# Altium PCB ui_layout-v1.0.1.PcbDoc
Units mil, origin at the board's own origin, x right, y up, seen from the top; angles counter-clockwise.
Board outline 3110 x 1889.76 mil, 4 copper layers (Power Plane, Signal Layer 1, Signal Layer 2, GND Plane), stack 61.811 mil thick; 45 components, 52 nets, 161 pads, 85 vias.
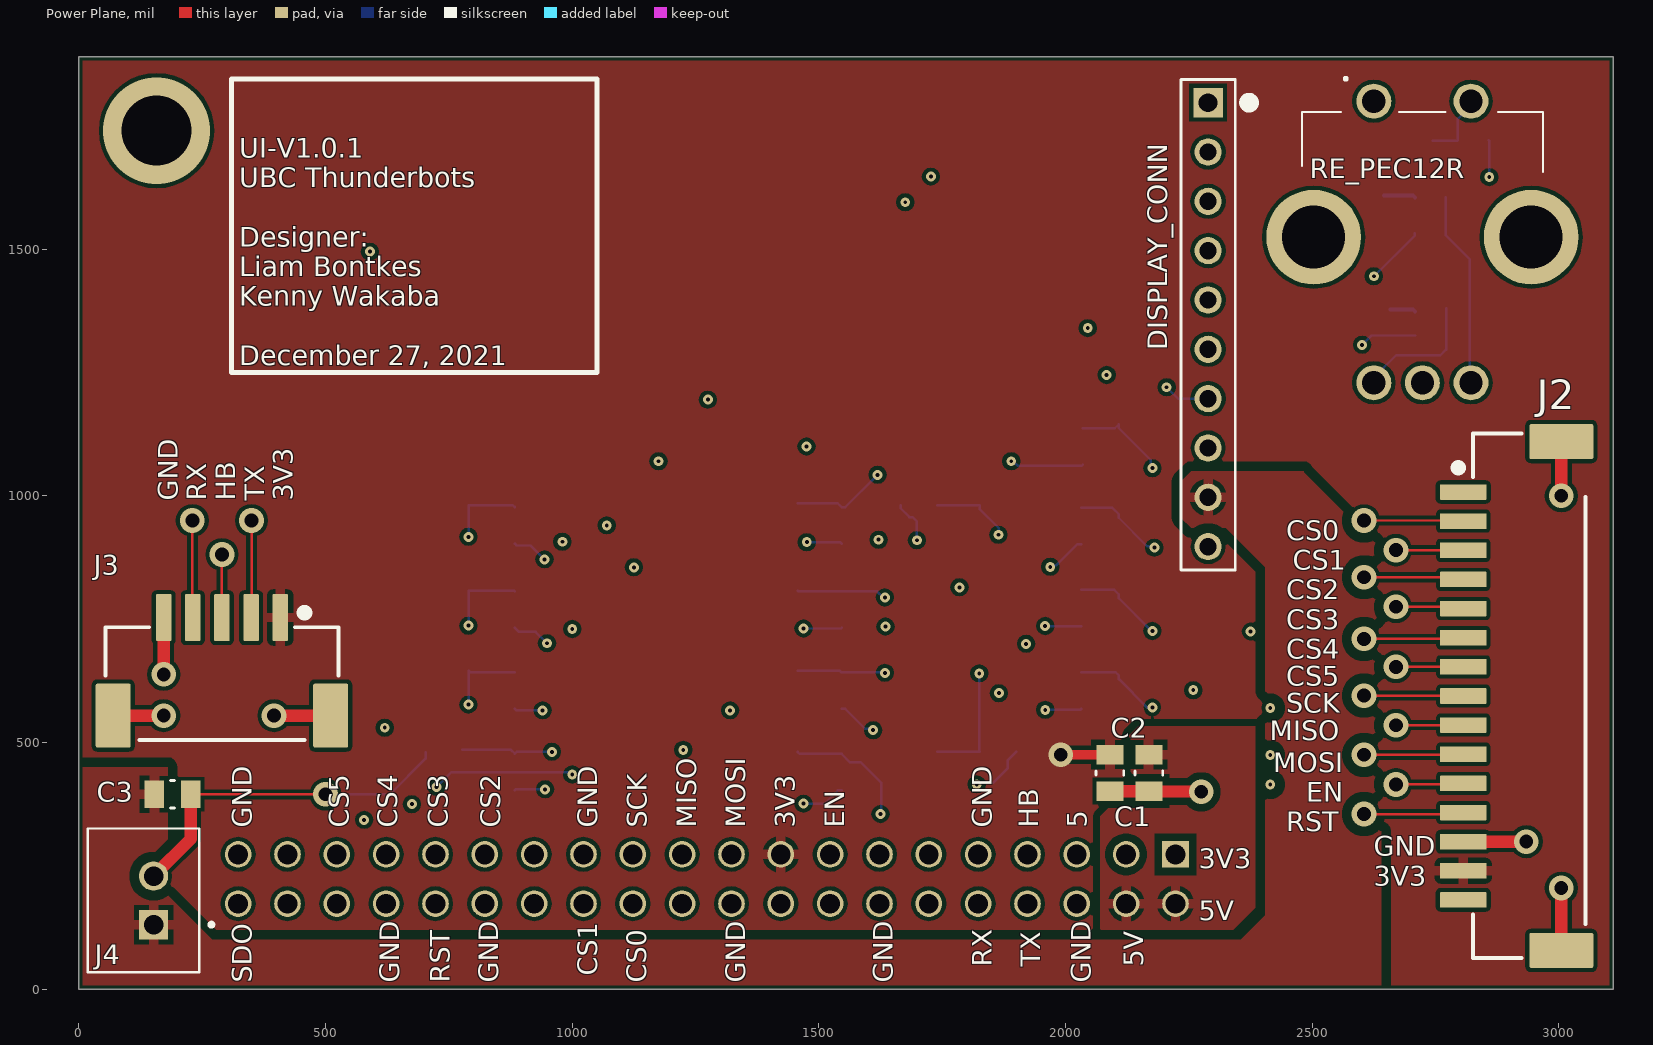
[diagram p0: Power Plane view]
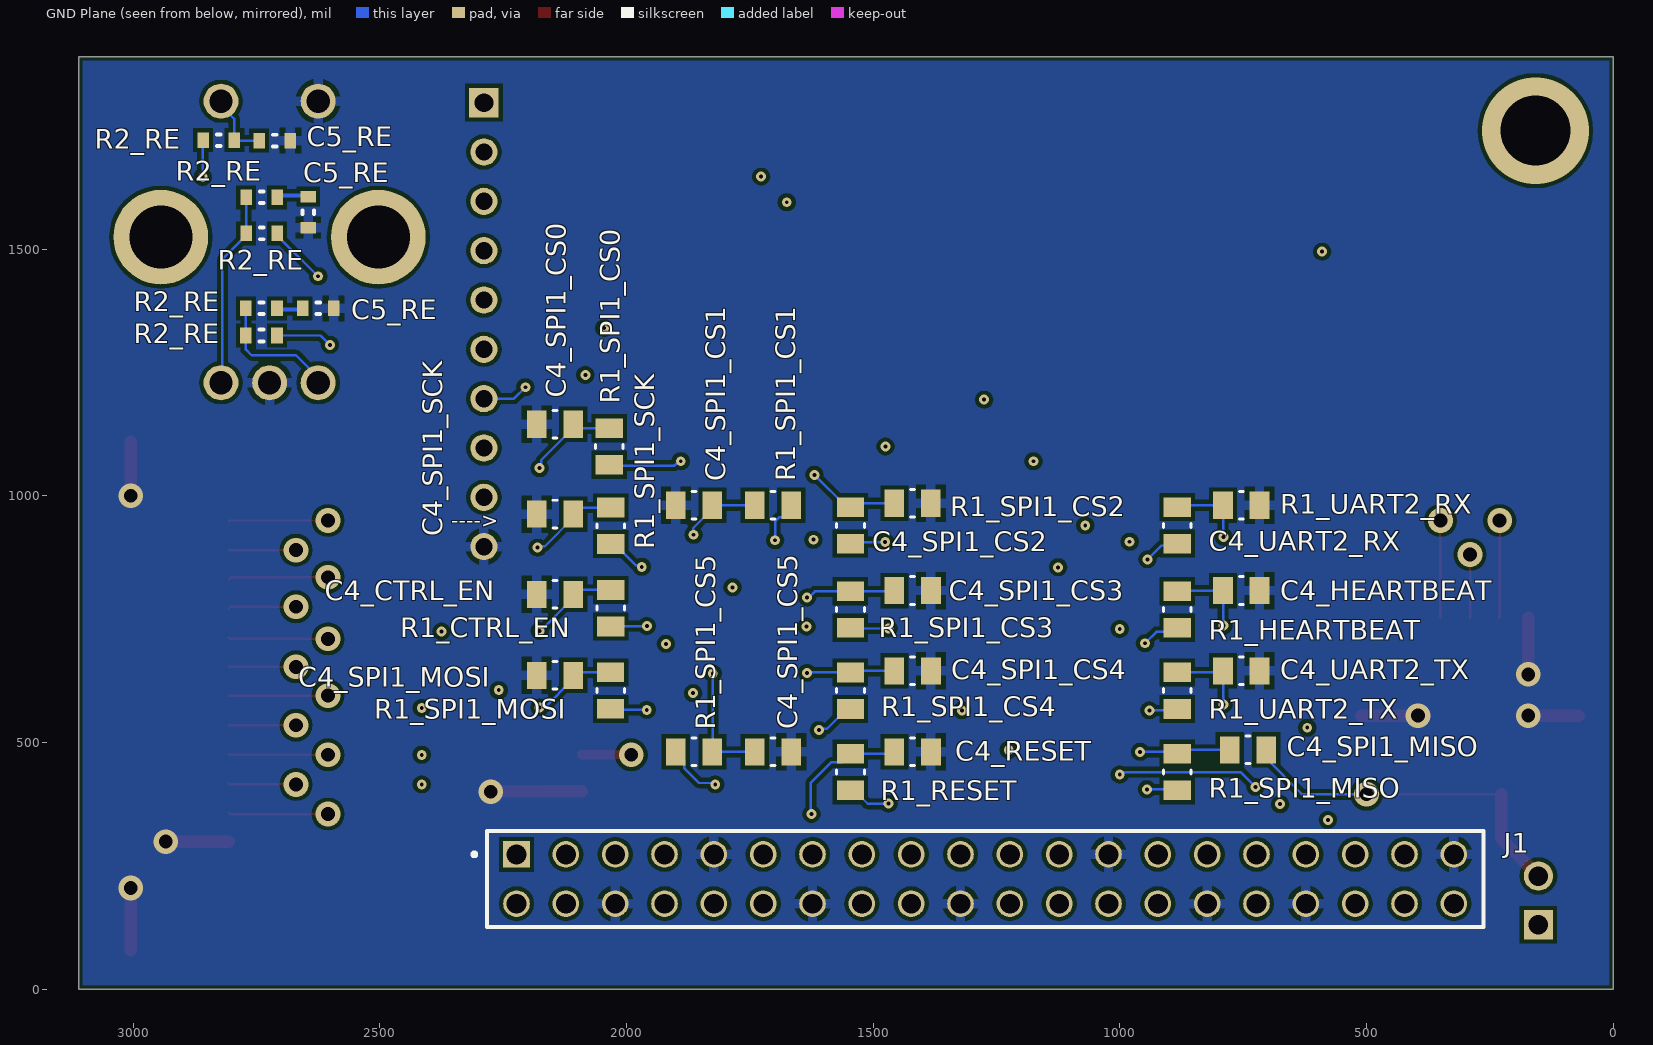
[diagram p1: GND Plane view, seen from below]
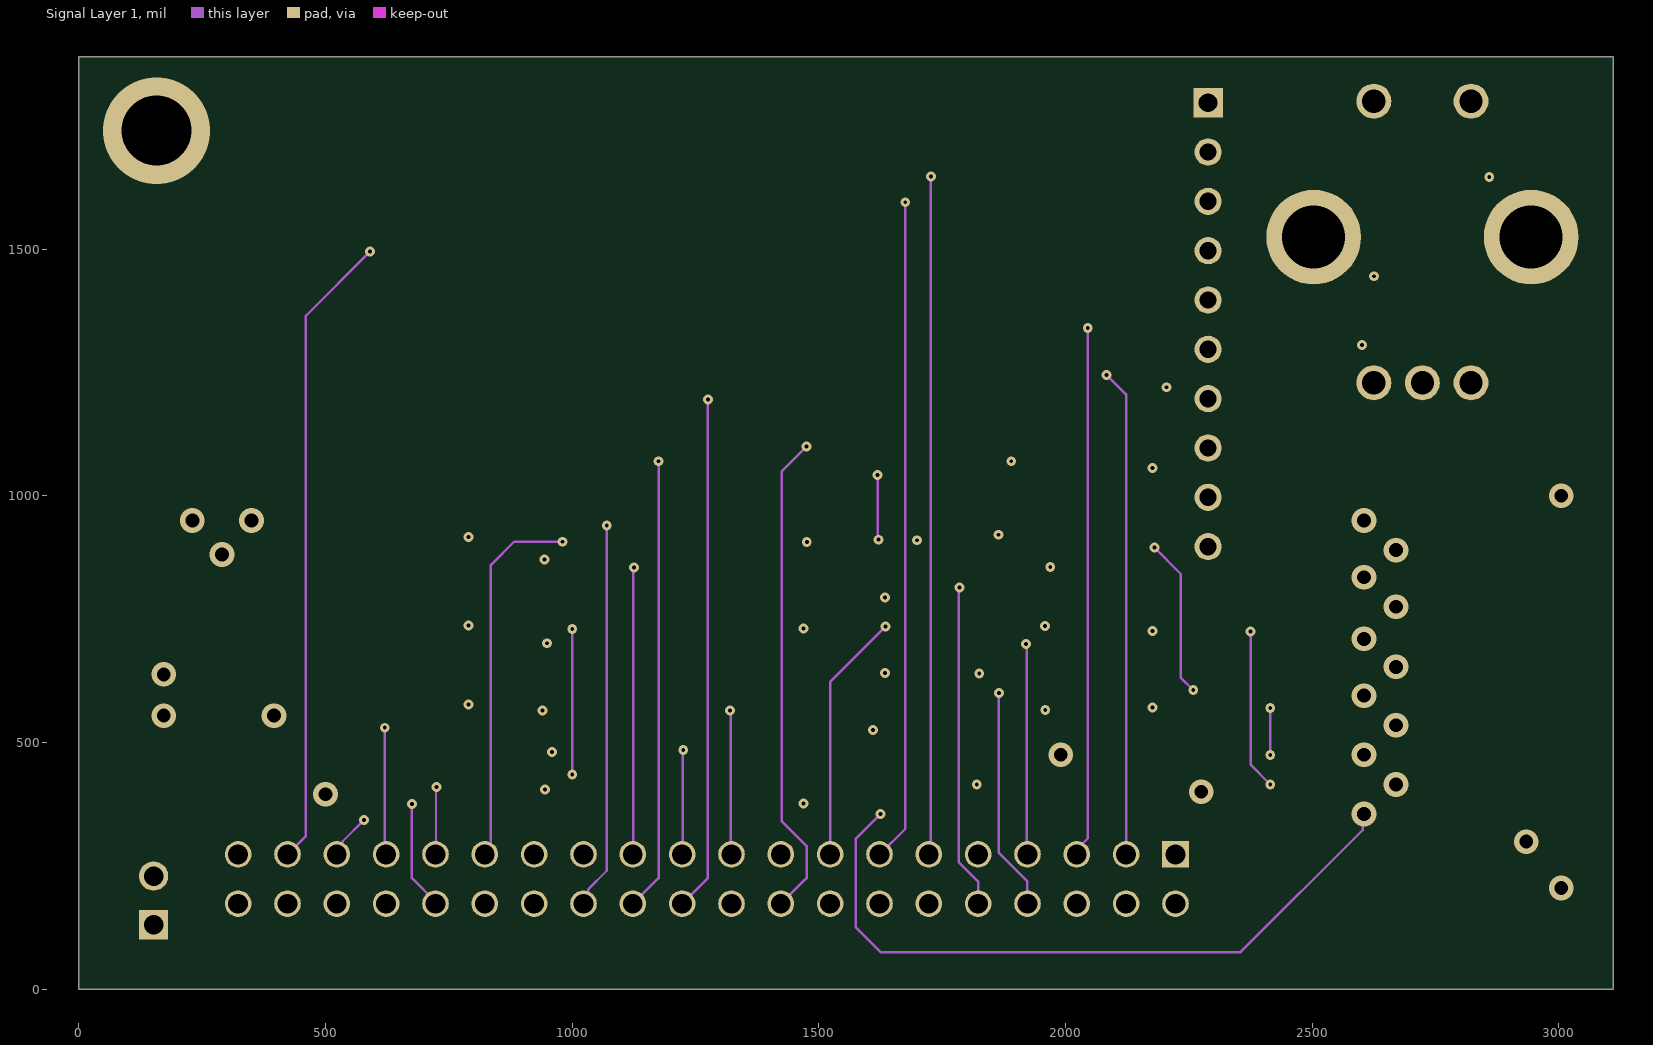
[diagram p2: Signal Layer 1]
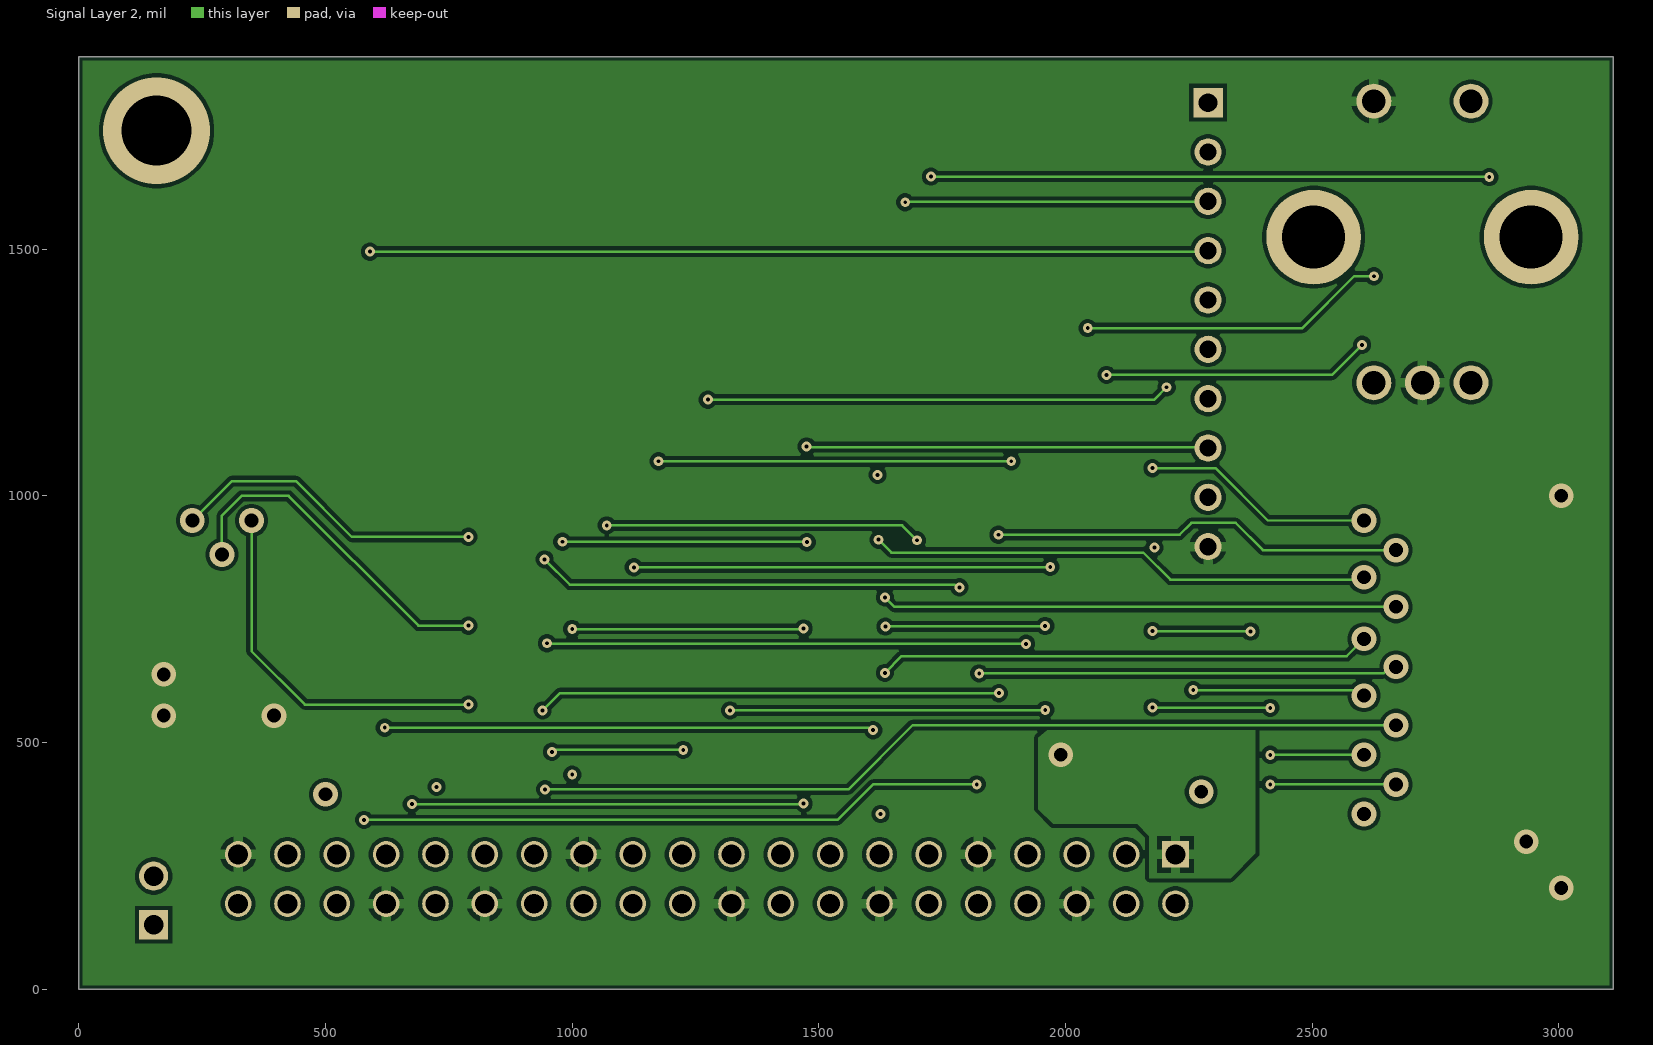
[diagram p3: Signal Layer 2]
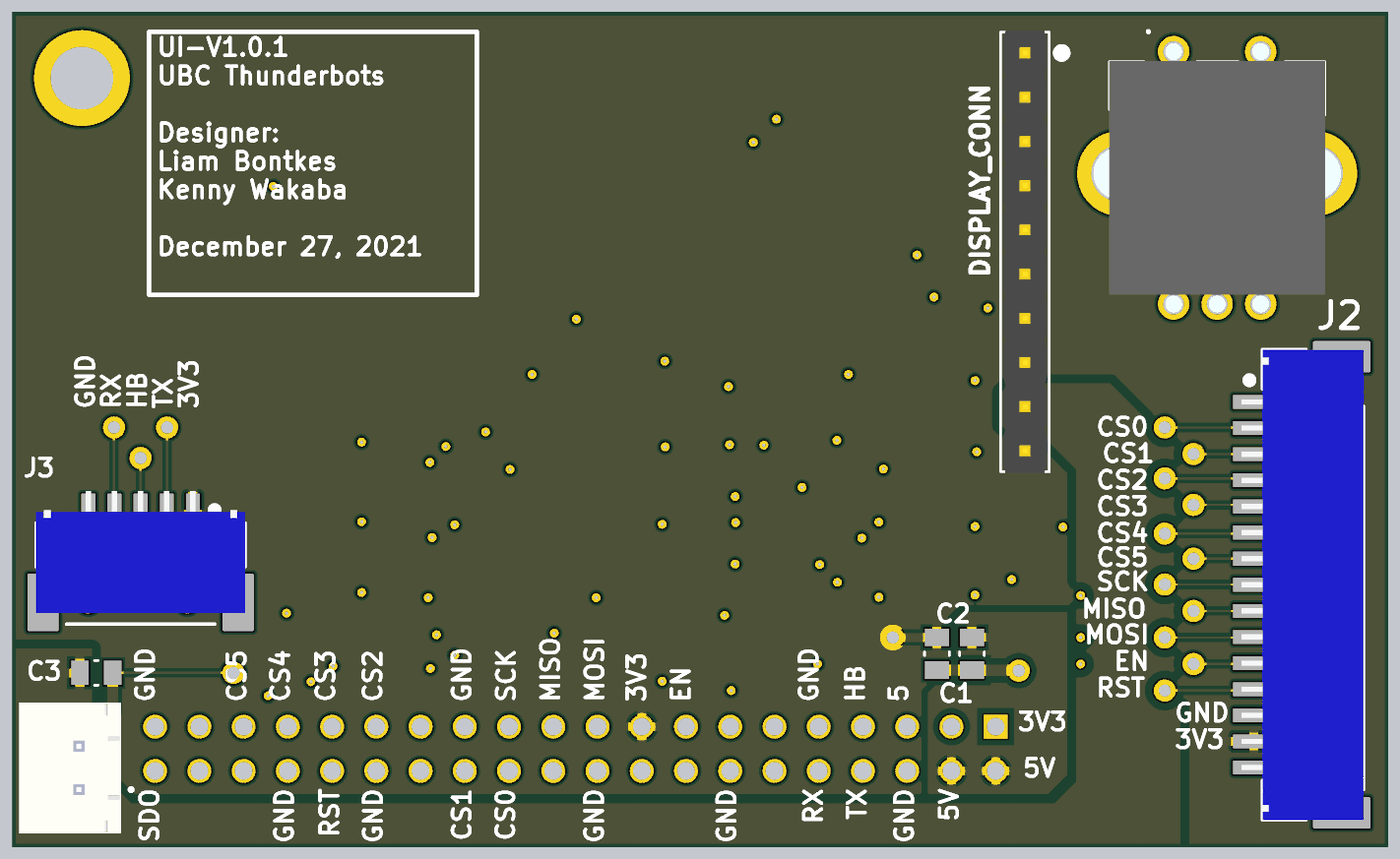
[diagram p4: 3D render of the assembled board from above, using the file's embedded part models]

## Layer stack, top to bottom
Top Mask: solder mask 0.5906, Solder Resist, Dk 3.8
Power Plane: signal copper 1.378
Dielectric 1: prepreg 3.937, 2313, Dk 4.05
Signal Layer 1: signal copper 0.689
Core: core 49.8031, FR-4, Dk 4.5
Signal Layer 2: signal copper 0.689
Dielectric 2: prepreg 3.937, 2313, Dk 4.05
GND Plane: signal copper 1.378
Bottom Mask: solder mask 0.5906, Solder Resist, Dk 3.8

## Board outline
0,0 0,1889.76 3110,1889.76 3110,0

## Design rules (kind name [scope] priority, off if disabled: settings)
BoardOutlineClearance [All] p1: gap=7.87 ignorepadtopadclearanceinfootprint=FALSE except(15.75: Arc-SplitBarrior Arc-SplitContinuation Track-SplitBarrior Track-SplitContinuation SMDPad-SplitBarrior SMDPad-SplitContinuation THPad-SplitBarrior THPad-SplitContinuation Via-SplitBarrior Via-SplitContinuation Fill-SplitBarrior Fill-SplitContinuation Poly-SplitBarrior Poly-SplitContinuation Region-SplitBarrior Region-SplitContinuation Text-SplitBarrior Text-SplitContinuation)
Clearance "JETSON_5V Polygon Clearance" [(InNet('JETSON_5V')) AND InPolygon] p1: gap=15 ignorepadtopadclearanceinfootprint=FALSE
Clearance "POWER_5V Polygon Clearance" [(InNet('POWER_5V')) AND InPolygon] p2: gap=20 ignorepadtopadclearanceinfootprint=TRUE
Clearance [All] p3: gap=8 ignorepadtopadclearanceinfootprint=FALSE
HoleSize [All] p1: absolutevalues=TRUE maxlimit=248.03 minlimit=7.87 maxpercent=80.000 minpercent=20.000
MinimumAnnularRing [All] p1: minimumring=3
MinimumSolderMaskSliver [All] p1: minsoldermaskwidth=3.94
PolygonConnect PolygonConnect_1 [All] p1: thpad.connectstyle=Relief thpad.reliefconductorwidth=20 thpad.reliefentries=4 thpad.polygonreliefangle="90 Angle" thpad.airgapwidth=10 smdpad.connectstyle=Relief smdpad.reliefconductorwidth=20 smdpad.reliefentries=4 smdpad.polygonreliefangle="90 Angle" smdpad.airgapwidth=10 via.connectstyle=Direct via.reliefconductorwidth=20 via.reliefentries=4 via.polygonreliefangle="90 Angle" via.airgapwidth=10
RoutingCorners [All] p1: cornerstyle=Round minsetback=100 maxsetback=100
RoutingVias [All] p1: holewidth=19.68 width=39.37 viastyle="Through Hole" minholewidth=7.87 minwidth=17.72 maxholewidth=39.37 maxwidth=78.74
SilkToSilkClearance [All] p1: silktosilkclearance=3.94
SilkToSolderMaskClearance [IsPad] p1: minsilkscreentomaskgap=3.94 clearancetoexposedcopper=TRUE
SolderMaskExpansion [All] p1: expansion=4 istentingtop=FALSE
Width [All] p1: maxlimit=100 minlimit=3.5 preferedwidth=15
25 further rules are at their usual default settings.

## Classes and differential pairs
component class ROTARY_ENCODER_FILTER: C5_RE R2_RE
component class "ROTARY ENCODER": RE_PEC12R
channel class low-pass-filter: CTRL_EN_FILTER HEARTBEAT_FILTER RESET_FILTER SPI1_CS0_FILTER SPI1_CS1_FILTER SPI1_CS2_FILTER SPI1_CS3_FILTER SPI1_CS4_FILTER SPI1_CS5_FILTER SPI1_MISO_FILTER SPI1_MOSI_FILTER SPI1_SCK_FILTER UART2_RX_FILTER UART2_TX_FILTER
component class UART2_TX_FILTER: C4_UART2_TX R1_UART2_TX
component class UART2_RX_FILTER: C4_UART2_RX R1_UART2_RX
component class U_power: C3 J3 J4
component class U_jetson-nano: C1 C2 J1
component class SPI1_SCK_FILTER: C4_SPI1_SCK R1_SPI1_SCK
component class SPI1_MOSI_FILTER: C4_SPI1_MOSI R1_SPI1_MOSI
component class SPI1_MISO_FILTER: C4_SPI1_MISO R1_SPI1_MISO
component class SPI1_CS5_FILTER: C4_SPI1_CS5 R1_SPI1_CS5
component class SPI1_CS4_FILTER: C4_SPI1_CS4 R1_SPI1_CS4
component class SPI1_CS3_FILTER: C4_SPI1_CS3 R1_SPI1_CS3
component class SPI1_CS2_FILTER: C4_SPI1_CS2 R1_SPI1_CS2
component class SPI1_CS1_FILTER: C4_SPI1_CS1 R1_SPI1_CS1
component class SPI1_CS0_FILTER: C4_SPI1_CS0 R1_SPI1_CS0
component class RESET_FILTER: C4_RESET R1_RESET
component class HEARTBEAT_FILTER: C4_HEARTBEAT R1_HEARTBEAT
component class CTRL_EN_FILTER: C4_CTRL_EN R1_CTRL_EN

## Components (designator, comment, footprint, x,y, rotation, side; value= is the part's Value field where it differs from the comment)
C1 "0.1uF 25V" 0805 2169.06,438.35 r90 top value=0.1uF
C2 "0.1uF 25V" 0805 2090,438.35 r90 top value=0.1uF
C3 "0.1uF 25V" 0805 190,395 r180 top value=0.1uF
C4_CTRL_EN "100pF 16V" 0805 2144.8,800.17 r180 bottom value=100pF
C4_HEARTBEAT "100pF 16V" 0805 753.73,808.01 r0 bottom value=100pF
C4_RESET "100pF 16V" 0805 1419.93,481 r0 bottom value=100pF
C4_SPI1_CS0 "100pF 16V" 0805 2144.8,1145 r180 bottom value=100pF
C4_SPI1_CS1 "100pF 16V" 0805 1862.99,980.84 r180 bottom value=100pF
C4_SPI1_CS2 "100pF 16V" 0805 1420,985 r0 bottom value=100pF
C4_SPI1_CS3 "100pF 16V" 0805 1419.93,808.01 r0 bottom value=100pF
C4_SPI1_CS4 "100pF 16V" 0805 1419.93,645.17 r0 bottom value=100pF
C4_SPI1_CS5 "100pF 16V" 0805 1702.99,481 r0 bottom value=100pF
C4_SPI1_MISO "100pF 16V" 0805 740,485 r0 bottom value=100pF
C4_SPI1_MOSI "100pF 16V" 0805 2145,636 r180 bottom value=100pF
C4_SPI1_SCK "100pF 16V" 0805 2144.8,963.01 r180 bottom value=100pF
C4_UART2_RX "100pF 16V" 0805 753.73,980.84 r0 bottom value=100pF
C4_UART2_TX "100pF 16V" 0805 753.73,645.18 r0 bottom value=100pF
C5_RE "Comment" 0603#1 2712.94,1720 r0 bottom
C5_RE "Comment" 0603#2 2625,1380 r0 bottom
C5_RE "Comment" 0603#3 2645,1575 r90 bottom
DISPLAY_CONN "Comment" 1-87224-0_TYC 2289,1797 r90 top
J1 "CN HDR 40POS" "CN HDR 40POS 0.1 TH" 1272.83,223.23 r0 bottom locked
J2 "Comment" "JST ZE SMT 15POS" 2914.45,564.72 r90 top
J3 "CN HDR 5POS" "CN HDR 5POS SMD 1.5MM" 290,645 r0 top
J4 "CN HDR 2POS JST XH" JST_B2B-XH-A(LF)(SN) 130.79,180 r90 top
R1_CTRL_EN "160" 0805 2031.84,772.23 r270 bottom value=1
R1_HEARTBEAT "160" 0805 883.65,769.45 r270 bottom value=1
R1_RESET "160" 0805 1545.92,440.17 r270 bottom value=1
R1_SPI1_CS0 "160" 0805 2035,1100 r270 bottom value=1
R1_SPI1_CS1 "160" 0805 1702.99,980.84 r180 bottom value=1
R1_SPI1_CS2 "160" 0805 1545.92,940.02 r270 bottom value=1
R1_SPI1_CS3 "160" 0805 1545.92,769.45 r270 bottom value=1
R1_SPI1_CS4 "160" 0805 1545.92,605 r270 bottom value=1
R1_SPI1_CS5 "160" 0805 1862.99,481 r0 bottom value=1
R1_SPI1_MISO "160" 0805 883.65,440.17 r270 bottom value=1
R1_SPI1_MOSI "160" 0805 2032.05,605.17 r270 bottom value=1
R1_SPI1_SCK "160" 0805 2031.84,939.29 r270 bottom value=1
R1_UART2_RX "160" 0805 883.65,940.02 r270 bottom value=1
R1_UART2_TX "160" 0805 883.65,605.1 r270 bottom value=1
R2_RE "Comment" 0603#4 2826.5,1721 r180 bottom
R2_RE "Comment" 0603#5 2739.5,1605 r180 bottom
R2_RE "Comment" 0603#6 2739.5,1532 r180 bottom
R2_RE "Comment" 0603#6 2740,1325 r180 bottom
R2_RE "Comment" 0603#7 2740,1380 r180 bottom
RE_PEC12R "Comment" PEC12R4220FS0024 2625,1800 r0 top

## Footprints (in the part's own frame and the unit in brackets; to place one, negate y for a bottom-side part, rotate by r counter-clockwise, add the part's x,y. Pads: shape width x height; smd on the part's side, far side on the other; paste and mask are expansions set on the pad)
1-87224-0_TYC [mil]
  round 55 hole 35 mask+0: CARD_CD(-500,0) D/C(-600,0) GND(-900,0) MISO(-100,0) MOSI(-300,0) RESET(-700,0) SCK(-200,0) TFT_CS(-400,0) VCC(-800,0)
  rect 60x60 hole 38 mask+0: LITE(0,0)
  silkscreen extent -947,-93 47,55, body extent -950,-50 50,50, height 90
0603#1 [mm] "Chip Resistor, 2-Leads, Body 1.60x0.80mm, IPC High Density"
  rect 0.6x0.8 smd: 1(-0.8,0) C5-2(0.8,0)
  silkscreen extent -0.1,-0.3 0.1,0.3, body extent -0.8,-0.4 0.8,0.4, height 0.6
0603#2 [mm] "Chip Resistor, 2-Leads, Body 1.60x0.80mm, IPC High Density"
  rect 0.6x0.8 smd: 1(-0.8,0) C5(0.8,0)
  silkscreen extent -0.1,-0.3 0.1,0.3, body extent -0.8,-0.4 0.8,0.4, height 0.6
0603#3 [mm] "Chip Resistor, 2-Leads, Body 1.60x0.80mm, IPC High Density"
  rect 0.6x0.8 smd: 1(-0.8,0) C5-1(0.8,0)
  silkscreen extent -0.1,-0.3 0.1,0.3, body extent -0.8,-0.4 0.8,0.4, height 0.6
0603#4 [mm] "Chip Resistor, 2-Leads, Body 1.60x0.80mm, IPC High Density"
  rect 0.6x0.8 smd: 1(-0.8,0) R2-2(0.8,0)
  silkscreen extent -0.1,-0.3 0.1,0.3, body extent -0.8,-0.4 0.8,0.4, height 0.6
0603#5 [mm] "Chip Resistor, 2-Leads, Body 1.60x0.80mm, IPC High Density"
  rect 0.6x0.8 smd: 1(-0.8,0) R2-1(0.8,0)
  silkscreen extent -0.1,-0.3 0.1,0.3, body extent -0.8,-0.4 0.8,0.4, height 0.6
0603#6 [mm] "Chip Resistor, 2-Leads, Body 1.60x0.80mm, IPC High Density"
  rect 0.6x0.8 smd: 1(-0.8,0) 2(0.8,0)
  silkscreen extent -0.1,-0.3 0.1,0.3, body extent -0.8,-0.4 0.8,0.4, height 0.6
0603#7 [mm] "Chip Resistor, 2-Leads, Body 1.60x0.80mm, IPC High Density"
  rect 0.6x0.8 smd: 1(-0.8,0) R2(0.8,0)
  silkscreen extent -0.1,-0.3 0.1,0.3, body extent -0.8,-0.4 0.8,0.4, height 0.6
0805 [mil]
  rect 40x55 smd: 1(-37,0) 2(37,0)
  silkscreen extent -4,-28 4,28, body extent -47,-28 47,28, height 24
"CN HDR 5POS SMD 1.5MM" [mm] "Connector Header Surface Mount 5 position 0.059\" (1.50mm)"
  rrect10% 1.8x3.3 smd: 0(-5.6,-2.3) 0(5.6,-2.3)
  rrect10% 0.8x2.4 smd: 1(3,2.75) 2(1.5,2.75) 3(0,2.75) 4(-1.5,2.75) 5(-3,2.75)
  silkscreen extent -6,-3.55 6,3, body extent -6,-2.9 6,4.1, height 7.51
"CN HDR 40POS 0.1 TH" [mm] "40 Position Header Connector 0.100\" (2.54mm) Through Hole"
  rect 1.37x1.37 hole 1.02: 01(24.13,-1.27)
  round 1.37 hole 1.02: 02(24.13,1.27) 03(21.59,-1.27) 04(21.59,1.27) 05(19.05,-1.27) 06(19.05,1.27) 07(16.51,-1.27) 08(16.51,1.27) 09(13.97,-1.27) 10(13.97,1.27) 11(11.43,-1.27) "12 "(11.43,1.27) 13(8.89,-1.27) 14(8.89,1.27) 15(6.35,-1.27) 16(6.35,1.27) 17(3.81,-1.27) 18(3.81,1.27) 19(1.27,-1.27) 20(1.27,1.27) 21(-1.27,-1.27) 22(-1.27,1.27) 23(-3.81,-1.27) 24(-3.81,1.27) 25(-6.35,-1.27) 26(-6.35,1.27) 27(-8.89,-1.27) 28(-8.89,1.27) 29(-11.43,-1.27) 30(-11.43,1.27) 31(-13.97,-1.27) 32(-13.97,1.27) 33(-16.51,-1.27) 34(-16.51,1.27) 35(-19.05,-1.27) 36(-19.05,1.27) 37(-21.59,-1.27) 38(-21.59,1.27) 39(-24.13,-1.27) 40(-24.13,1.27)
  silkscreen extent -25.65,-2.48 26.4,2.47
"JST ZE SMT 15POS" [mm] "15 POS HDR JST ZE"
  rrect10% 1.8x3.3 smd: 0(-12.35,-2.3) 0(13.85,-2.3)
  rrect10% 0.8x2.4 smd: 1(11.25,2.75) 2(9.75,2.75) 3(8.25,2.75) 4(6.75,2.75) 5(5.25,2.75) 6(3.75,2.75) 7(2.25,2.75) 8(0.75,2.75) 9(-0.75,2.75) 10(-2.25,2.75) 11(-3.75,2.75) 12(-5.25,2.75) 13(-6.75,2.75) 14(-8.25,2.75) 15(-9.75,2.75)
  silkscreen extent -12.75,-3.55 14.26,3, body extent -12.75,-3.55 14.25,3.45, height 7.6
JST_B2B-XH-A(LF)(SN) [mm]
  rect 1.508x1.508 hole 1: 1(-1.25,-0.525)
  round 1.508 hole 1: 2(1.25,-0.525)
  silkscreen extent -3.7,-3.6 3.7,2.88, body extent -3.7,-2.85 3.7,2.9, height 7.1
PEC12R4220FS0024 [mm]
  round 1.8 hole 1.2: 1(0,0) 2(5,0) A1(0,-14.5) B1(5,-14.5) C1(2.5,-14.5)
  round 4.875 hole 3.25: MH1(8.1,-7) MH2(-3.1,-7)
  silkscreen extent -3.7,-3.65 8.7,1.2, body extent -4.61,-15 9.62,0.5, height 20.1

## Part data
C1 C2 C3: library part "CAP 0.1uF 25V", "Default Symbol for Capacitors", Operating Temperature="-55°C ~ 125°C", Rating=25V, Temperature Coefficient=X7R, Tolerance=10%, Part Number="CAP 0.1uF 25V"
C4_CTRL_EN C4_HEARTBEAT C4_RESET C4_SPI1_CS0 C4_SPI1_CS1 C4_SPI1_CS2 C4_SPI1_CS3 C4_SPI1_CS4 C4_SPI1_CS5 C4_SPI1_MISO C4_SPI1_MOSI C4_SPI1_SCK C4_UART2_RX C4_UART2_TX: library part "CAP 100pF 16V", "Default Symbol for Capacitors", Operating Temperature="-55°C ~ 125°C", Rating=16V, Temperature Coefficient=X5R, Tolerance=10%, Part Number="CAP 100pF 16V"
C5_RE C5_RE C5_RE: library part "CAP 0.010uF 16V"
DISPLAY_CONN: library part "CONN HEADER VERT 10POS"
J1: "40 Position Header Connector", Supplier Part Number 1=S6104-ND, Part Number="CN HDR 40POS", Pin Count=40, Supplier 1=Digi-Key, Supplier URL 1=https://www.digikey.ca/en/products/detail/sullins-connector-solutions/PPTC202LFBN-RC/807240?s=N4IgTCBcDaIMoDYCMAGALAWgHIBEQF0BfIA
J2: library part "CN 15POS JST ZE SMT"
J3: "Connector Header 5 Position", Supplier Part Number 1=455-2383-1-ND, Part Number="CN HDR 5POS", Pin Count=5, Supplier 1=Digi-Key, Supplier URL 1=https://www.digikey.ca/en/products/detail/jst-sales-america-inc/BM05B-ZESS-TBT-LF-SN/1886989?s=N4IgTCBcDaICwFYEFowGYAcbkEZkDkAREAXQF8g
J4: "Connector Header Through Hole 2 position 0.098 _2.50mm_ / JST XH", Package=None, MF="JST Sales", MP=B2B-XH-A_LF__SN_, Part Number="CN HDR 2POS JST XH", Pin Count=2, Price=None, SnapEDA_Link=https://www.snapeda.com/parts/B2B-XH-A%28LF%29%28SN%29/JST%20Sales%20America%20Inc./view-part/492310/?ref=snap
R1_CTRL_EN R1_HEARTBEAT R1_RESET R1_SPI1_CS0 R1_SPI1_CS1 R1_SPI1_CS2 R1_SPI1_CS3 R1_SPI1_CS4 R1_SPI1_CS5 R1_SPI1_MISO R1_SPI1_MOSI R1_SPI1_SCK R1_UART2_RX R1_UART2_TX: library part "RES 160.0 1/8W", "Default Resistor Symbol", Package=0805, Power (Watts)=0.125W, Tolerance=5%, Part Number="RES 160.0 1/8W"
R2_RE R2_RE R2_RE R2_RE R2_RE: library part "RES 10k 1/8W - 1%"

## Via types
v1: diameter 20, hole 7.87, Power Plane to GND Plane, 61 vias
v2: diameter 50, hole 28, Power Plane to GND Plane, 22 vias
v3: diameter 50, hole 27.56, Power Plane to GND Plane, 1 vias
v4: diameter 216.54, hole 141.73, Power Plane to GND Plane, 1 vias

## Nets (pads, with @x,y where several pads share a name; then routed paths per layer and width w, separated by ;. In a path a pad name is that pad's centre, name@x,y a point inside that pad or via, vN(x,y) a via of type N, cw(c..) or ccw(c..) an arc to the next point about the centre after c; other vN are vias at no path point)
CTRL_EN: J1.15 R1_CTRL_EN.2 | length 905.9
  Signal Layer 1 w5: J1.15 1522.83,622.83 v1(1635,735)
  Signal Layer 2 w5: v1(1635,735) 1635.54,735.54 1958.15,735.54 v1(1958.69,736.08)
  GND Plane w5: v1(1958.69,736.08) 2030.99,736.08 R1_CTRL_EN.2
CTRL_EN_FILTER: C4_CTRL_EN.2 J2.11 R1_CTRL_EN.1 | length 1100.9
  Power Plane w5: v2(2670,415) 2804.09,415 J2.11
  Signal Layer 1 w5: v1(2375,725) 2375,455 v1(2415,415)
  Signal Layer 2 w5: v1(2176.08,726.08) 2176.62,725.54 2374.46,725.54 v1(2375,725) ; v1(2415,415) v2(2670,415)
  GND Plane w5: R1_CTRL_EN.1 2098.74,809.23 C4_CTRL_EN.2 2107.79,792.67 v1@2175.47,725
HEARTBEAT: J1.07 R1_HEARTBEAT.2 | length 1476.2
  Signal Layer 1 w5: v1(1920,700) 1921.42,698.58 1921.42,274.64 J1.07
  Signal Layer 2 w5: v1@950,700 v1(1920,700)
  GND Plane w5: R1_HEARTBEAT.2 891.83,724.28 925.72,724.28 v1(948.92,701.08)
HEARTBEAT_FILTER: C4_HEARTBEAT.2 J3.3 R1_HEARTBEAT.1 | length 997.8
  Power Plane w5: J3.3 v2(290,880.95)
  Signal Layer 2 w5: v2(290,880.95) 290,960 330,1000 425,1000 688.18,736.82 v1(789.65,736.82)
  GND Plane w5: v1@790.73,735.73 C4_HEARTBEAT.2 882.09,808.01 R1_HEARTBEAT.1
I2C_1_SCL: J1.28
I2C_1_SDA: J1.27
I2C_2_SCL: J1.05 R2_RE.2@2708.01,1532 | length 1820.8
  Signal Layer 1 w5: J1.05 2022.83,283.38 2045,305.55 v1(2045,1340)
  Signal Layer 2 w5: v1(2045,1340) 2480,1340 2585,1445 v1(2625,1445)
  GND Plane w5: v1(2625,1445) 2625,1445.06 2708.01,1528.06 R2_RE.2@2708.01,1532
I2C_2_SDA: J1.03 R2_RE.2@2708.5,1325 | length 1644.9
  Signal Layer 1 w5: v1(2083.35,1245) 2122.83,1205.52 J1.03
  Signal Layer 2 w5: v1(2083.35,1245) 2540,1245 v1@2600,1305
  GND Plane w5: v1(2601.08,1306.08) 2620,1325 R2_RE.2@2708.5,1325
I2S_4_SCLK: "J1.12 "
I2S_4_SDIN: J1.38
I2S_4_SDOUT: J1.40
JETSON_3V3: C2.2 J1.01 J1.17 J2.14 J3.1 | length 99.8
  Power Plane w20: v2(1990.33,475) 1990.51,475.17 2089.83,475.17 C2.2
JETSON_5V: C1.2 J1.02 J1.04
JETSON_GND: C1.1 C2.1 C4_CTRL_EN.1 C4_HEARTBEAT.1 C4_RESET.1 C4_SPI1_CS0.1 C4_SPI1_CS1.1 C4_SPI1_CS2.1 C4_SPI1_CS3.1 C4_SPI1_CS4.1 C4_SPI1_CS5.1 C4_SPI1_MOSI.1 C4_SPI1_SCK.1 C4_UART2_RX.1 C4_UART2_TX.1 C5_RE.1 DISPLAY_CONN.GND J1.06 J1.09 J1.14 J1.20 J1.25 J1.30 J1.34 J1.39 J2.0 J2.13 J3.0 J3.5 RE_PEC12R.1 RE_PEC12R.C1 | length 880.6
  Power Plane w25: J3.0@69.53,554.45 169.45,554.45 v2@170,555 ; v2(171.89,638.11) J3.5 ; v2(395.55,554.45) J3.0@510.48,554.45 ; C2.1 C1.1 2169.73,400.67 2274.33,400.67 v2(2275,400) ; J2.13 v2(2933.98,298.98) ; J2.0@3005,78.5 v2(3005,205) ; v2(3005,1000) J2.0@3005,1110
  other v2: 171.89,554.45
NetJ2_8: J2.9 R1_SPI1_MISO.2 | length 1977.9
  Power Plane w5: v2(2670,535) 2804.21,535 2805.29,536.08 J2.9
  Signal Layer 2 w5: v1(945,405) 1560,405 1690,535 v2(2670,535)
  GND Plane w5: R1_SPI1_MISO.2 885.48,405 v1(945,405)
POWER_5V: C3.2 DISPLAY_CONN.VCC J4.1
POWER_GND: C3.1 C4_SPI1_MISO.1 J4.2 | length 715.7
  Power Plane w5: C3.1 v2(500,395)
  Power Plane w25: J4.2 227,304.76 C3.1
  GND Plane w5: v2(500,395) 630.73,395 703,467.27 C4_SPI1_MISO.1@703,480
RESET: J1.32 R1_RESET.2 | length 1105.1
  Signal Layer 1 w5: v1(675,375) 675,225 722.83,177.17 J1.32
  Signal Layer 2 w5: v1(675,375) v1@1470,375
  GND Plane w5: v1(1468.92,376.08) 1469.29,375.71 1510.95,375.71 1538.42,403.17 R1_RESET.2
RESET_FILTER: C4_RESET.2 J2.12 R1_RESET.1 | length 1896.6
  Power Plane w5: v3(2605,355) 2803.15,355 J2.12
  Signal Layer 1 w5: v1(1625,355) 1575,305 1575,125 1625,75 2355,75 2602.5,322.5 2602.5,352.5 v3(2605,355)
  GND Plane w5: C4_RESET.2 1460.76,477.17 R1_RESET.1 1563.42,459.67 1585.33,459.67 1626.08,418.92 1626.08,356.08 v1(1625,355)
ROTARY_ENCODER_FILTER: C5_RE.C5-1 R2_RE.R2-1 | length 64.6
  GND Plane w7.99: C5_RE.C5-1@2645,1608.94 2704.07,1608.94 R2_RE.R2-1
ROTARY_ENCODER_FILTER-1: C5_RE.C5 R2_RE.R2 | length 51.1
  GND Plane w7.99: C5_RE.C5@2658.5,1377.94 2704.07,1377.94 R2_RE.R2@2708.01,1374
ROTARY_ENCODER_FILTER_A1: R2_RE.1@2771.5,1325 R2_RE.1@2771.5,1380 RE_PEC12R.A1 | length 264.5
  GND Plane w5: RE_PEC12R.A1@2622,1230.13 2622,1237 2670,1285 2760,1285 2771.5,1296.5 2771.5,1325 R2_RE.1@2771.5,1380
ROTARY_ENCODER_FILTER_B1: R2_RE.1@2771,1532 R2_RE.1@2771,1605 RE_PEC12R.B1 | length 394.9
  GND Plane w5: R2_RE.1@2771,1605 2771,1532 2771,1528.06 2819.06,1480 2819.06,1230.35 RE_PEC12R.B1@2818.85,1230.13
ROTARY_ENCODER_PUSH_BUTTON_FILTER: C5_RE.C5-2 R2_RE.R2-2 RE_PEC12R.2 | length 140.9
  GND Plane w5: C5_RE.C5-2 2794.01,1720 R2_RE.R2-2 2795.01,1764.13 2818.85,1787.97 RE_PEC12R.2@2818.85,1801
SPI_1_CS0: J1.24 R1_SPI1_CS0.2 | length 1783.1
  Signal Layer 1 w5: J1.24 1123.23,173.23 1175,225 v1(1175,1070)
  Signal Layer 2 w5: v1(1175,1070) v1(1890,1070)
  GND Plane w5: v1(1890,1070) 1894.06,1070 1902.98,1061.08 2033.08,1061.08 R1_SPI1_CS0.2
SPI_1_CS0_FILTER: C4_SPI1_CS0.2 J2.2 R1_SPI1_CS0.1 | length 869.5
  Power Plane w5: v2(2605,950) 2804.76,950 J2.2
  Signal Layer 2 w5: v1@2177.17,1055 v1(2176.08,1056.08) 2303.92,1056.08 2410,950 v2(2605,950)
  GND Plane w5: R1_SPI1_CS0.1 2099.8,1137 C4_SPI1_CS0.2 2107.8,1137.5 2173.21,1072.08 2173.21,1058.95 v1(2176.08,1056.08)
SPI_1_CS1: J1.26 R1_SPI1_CS1.2 | length 1516
  Signal Layer 1 w5: J1.26 1032.2,182.59 1032.2,202.2 1070,240 v1(1070,940)
  Signal Layer 2 w5: v1(1070,940) 1668.58,940 v1(1698.75,909.83)
  GND Plane w5: R1_SPI1_CS1.2 1665.99,974.29 1683.49,956.79 1690.04,956.79 1698.75,948.08 v1(1698.75,909.83)
SPI_1_CS1_FILTER: C4_SPI1_CS1.2 J2.3 R1_SPI1_CS1.1 | length 1139
  Power Plane w5: v2(2670,890) 2803.54,890 2804.63,891.08 J2.3
  Signal Layer 2 w5: v1(1863.92,921.08) 2231.08,921.08 2255,945 2345,945 2400,890 v2(2670,890)
  GND Plane w5: R1_SPI1_CS1.1 C4_SPI1_CS1.2 1825.99,973.34 1865,934.33 v1@1865,920
SPI_1_CS2: J1.29 R1_SPI1_CS2.2 | length 1323.8
  Signal Layer 1 w5: J1.29 822.83,286.47 835,298.64 835,860 881.98,906.98 v1(980,906.98)
  Signal Layer 2 w5: v1(980,906.98) 980.45,906.53 1475.12,906.53 v1(1475.56,906.08)
  GND Plane w5: v1(1475.56,906.08) 1542.85,906.08 R1_SPI1_CS2.2
SPI_1_CS2_FILTER: C4_SPI1_CS2.2 J2.4 R1_SPI1_CS2.1 | length 1547.2
  Power Plane w5: v2(2605,835) 2801.65,835 J2.4@2805.57,831.08
  Signal Layer 1 w5: v1(1618.97,1042.57) 1618.97,911.03 v1@1620,910
  Signal Layer 2 w5: v1(1621.08,911.08) 1647.17,885 2157.5,885 2212.5,830 2600,830 v2(2605,835)
  GND Plane w5: C4_SPI1_CS2.2 1537.93,985 R1_SPI1_CS2.1 1553.42,977.02 v1(1618.97,1042.57)
SPI_1_CS3: J1.31 R1_SPI1_CS3.2 | length 1269.7
  Signal Layer 1 w5: J1.31 723.92,274.31 723.92,408.92 v1(725,410) ; v1(1000,435) v1(1000,730)
  Signal Layer 2 w5: v1(1000,730) v1@1470,730
  GND Plane w5: v1(725,410) 755,440 990.94,440 995.94,435 v1(1000,435) ; v1(1468.92,731.08) 1544.55,731.08 R1_SPI1_CS3.2
SPI_1_CS3_FILTER: C4_SPI1_CS3.2 J2.5 R1_SPI1_CS3.1 | length 1365.3
  Power Plane w5: v2(2670,775) 2800.43,775 2801.52,776.08 J2.5
  Signal Layer 2 w5: v1(1633.92,794) 1652.92,775 v2(2670,775)
  GND Plane w5: C4_SPI1_CS3.2 1458.49,806.45 R1_SPI1_CS3.1 1618.08,806.45 1630.53,794 v1(1633.92,794)
SPI_1_CS4: J1.33 R1_SPI1_CS4.2 | length 1331.9
  Signal Layer 1 w5: v1(620,530) 620,276.06 J1.33
  Signal Layer 2 w5: v1(620,530) 1600.94,530 1605.94,525 v1(1610,525)
  GND Plane w5: R1_SPI1_CS4.2 1553.42,568 1593.55,527.87 1607.13,527.87 v1(1610,525)
SPI_1_CS4_FILTER: C4_SPI1_CS4.2 J2.6 R1_SPI1_CS4.1 | length 1381.2
  Power Plane w5: v2(2605,710) 2803.82,710 J2.6
  Signal Layer 2 w5: v1(1633.92,641.08) 1667.83,675 2570,675 v2(2605,710)
  GND Plane w5: C4_SPI1_CS4.2 1542.74,645.17 R1_SPI1_CS4.1 v1@1635,642
SPI_1_CS5: J1.35 R1_SPI1_CS5.2 | length 1485.7
  Signal Layer 1 w5: J1.35 522.83,286.47 534.97,298.61 534.97,299.84 v1(578.16,343.03)
  Signal Layer 2 w5: v1(578.16,343.03) 1538.03,343.03 1610,415 v1(1820,415)
  GND Plane w5: J1.35 J1.35@522.83,277.83 ; v1(1820,415) 1822.87,417.87 1852.87,417.87 1882.49,447.49 1882.49,463.5 R1_SPI1_CS5.2
SPI_1_CS5_FILTER: C4_SPI1_CS5.2 J2.7 R1_SPI1_CS5.1 | length 1232.1
  Power Plane w5: v2(2670,653.31) J2.7
  Signal Layer 2 w5: v1(1825,640) 2644.52,640 2657.82,653.31 v2(2670,653.31)
  GND Plane w5: C4_SPI1_CS5.2 R1_SPI1_CS5.1 1825,481.99 v1(1825,640)
SPI_1_MISO: C4_SPI1_MISO.2 J1.21 R1_SPI1_MISO.1 | length 666.5
  Signal Layer 1 w5: J1.21 1223.92,274.31 1223.92,483.92 v1(1225,485)
  Signal Layer 2 w5: v1@960,480 965,485 v1(1225,485)
  GND Plane w5: C4_SPI1_MISO.2 875.82,485 R1_SPI1_MISO.1 887.56,481.08 v1(958.92,481.08)
SPI_1_MOSI: J1.19 R1_SPI1_MOSI.2 | length 1006.9
  Signal Layer 1 w5: v1(1320,565) 1321.42,563.58 1321.42,274.64 J1.19
  Signal Layer 2 w5: v1(1320,565) v1@1960,565
  GND Plane w5: v1(1958.92,566.08) 2029.96,566.08 R1_SPI1_MOSI.2
SPI_1_MOSI_FILTER: C4_SPI1_MOSI.2 J2.10 R1_SPI1_MOSI.1 | length 903.3
  Power Plane w5: v2(2605,475) 2805.04,475 J2.10
  Signal Layer 1 w5: v1(2415,475) v1(2415,570)
  Signal Layer 2 w5: v1(2176.08,571.08) 2176.62,570.54 2414.46,570.54 v1(2415,570) ; v1(2415,475) v2(2605,475)
  GND Plane w5: R1_SPI1_MOSI.1 2101.83,642.17 C4_SPI1_MOSI.2 2108,628.5 2166.5,570 v1@2175,570
SPI_1_SCK: J1.23 R1_SPI1_SCK.2 | length 1509.7
  Signal Layer 1 w5: J1.23 1123.92,274.31 1123.92,853.92 v1(1125,855)
  Signal Layer 2 w5: v1(1125,855) v1@1970,855
  GND Plane w5: v1(1968.92,856.08) 1971.79,858.95 1981.01,858.95 2024.34,902.29 R1_SPI1_SCK.2
SPI_1_SCK_FILTER: C4_SPI1_SCK.2 J2.8 R1_SPI1_SCK.1 | length 1058.5
  Power Plane w5: v2(2605,595) 2805.43,595 J2.8
  Signal Layer 1 w5: v1(2180,895) 2233.92,841.08 2233.92,631.08 v1(2258.92,606.08)
  Signal Layer 2 w5: v1(2258.92,606.08) 2588.92,606.08 v2@2602.5,592.5
  GND Plane w5: R1_SPI1_SCK.1 2094.52,976.29 C4_SPI1_SCK.2 2107.8,955.51 2165.43,897.87 2177.13,897.87 v1(2180,895)
SPI_2_CS0: DISPLAY_CONN.RESET J1.18 | length 1807.4
  Power Plane w5: DISPLAY_CONN.RESET@2287.5,1098.5 DISPLAY_CONN.RESET
  Signal Layer 1 w5: J1.18 1423.23,173.23 1475,225 1475,290 1425,340 1425,1050 v1(1475,1100)
  Signal Layer 2 w5: v1(1475,1100) 1476.5,1098.5 2287.5,1098.5 DISPLAY_CONN.RESET
SPI_2_CS1: J1.16
SPI_2_MISO: DISPLAY_CONN.D/C J1.22 | length 2077.5
  Signal Layer 1 w5: J1.22 1223.23,173.23 1275,225 v1(1275,1195)
  Signal Layer 2 w5: v1(1275,1195) 2180,1195 v1(2205,1220)
  GND Plane w5: v1(2205,1220) 2228,1197 DISPLAY_CONN.D/C
SPI_2_MOSI: DISPLAY_CONN.MOSI J1.37 | length 2994.7
  Power Plane w5: v1(590,1495) v1@591,1496 ; DISPLAY_CONN.MOSI@2288,1496 DISPLAY_CONN.MOSI
  Signal Layer 1 w5: J1.37 460,310.39 460,1365 v1(590,1495)
  Signal Layer 2 w5: v1(590,1495) DISPLAY_CONN.MOSI@2288,1495 ; DISPLAY_CONN.MOSI@2288,1496 DISPLAY_CONN.MOSI
  GND Plane w5: DISPLAY_CONN.MOSI@2288,1496 DISPLAY_CONN.MOSI
SPI_2_SCK: DISPLAY_CONN.SCK J1.13 | length 1958.4
  Signal Layer 1 w5: J1.13 1623.23,273.23 1675,325 v1(1675,1595)
  Signal Layer 2 w5: v1@1676,1596 DISPLAY_CONN.SCK@2288,1596
  GND Plane w5: v1(1675,1595) v1@1676,1596 ; DISPLAY_CONN.SCK@2288,1596 DISPLAY_CONN.SCK
UART_2_CTS: J1.36
UART_2_RTS: J1.11 R2_RE.1@2858,1721 | length 2583.7
  Signal Layer 1 w5: J1.11 1727.13,277.52 v1(1727.13,1647.13)
  Signal Layer 2 w5: v1@1727.29,1646.97 v1@2860,1646.97
  GND Plane w5: R2_RE.1@2858,1721 2858.92,1720.08 v1(2858.92,1646.08)
UART_2_RX: J1.10 R1_UART2_RX.2 | length 1595.8
  Signal Layer 1 w5: v1(1785,814.5) 1783.99,813.49 1783.99,256.91 1822.83,218.07 J1.10
  Signal Layer 2 w5: v1@945,870 995,820 1775.44,820 1780.94,814.5 v1(1785,814.5)
  GND Plane w5: R1_UART2_RX.2 887.39,899.28 915.72,899.28 v1@945,870
  other v1: 943.92,871.08
UART_2_RX_FILTER: C4_UART2_RX.2 J3.4 R1_UART2_RX.1 | length 996.4
  Power Plane w5: v2(230,950) 230,754.22 J3.4
  Signal Layer 2 w5: v2(230,950) 310,1030 440,1030 553.18,916.82 v1(789.65,916.82)
  GND Plane w5: v1@790.73,915.73 C4_UART2_RX.2 879.83,980.84 R1_UART2_RX.1
UART_2_TX: J1.08 R1_UART2_TX.2 | length 1447.9
  Signal Layer 1 w5: v1(1865,600) 1865,276.14 1922.83,218.3 J1.08
  Signal Layer 2 w5: v1(940,565) 975,600 v1(1865,600)
  GND Plane w5: R1_UART2_TX.2 886.76,565 v1(940,565)
UART_2_TX_FILTER: C4_UART2_TX.2 J3.2 R1_UART2_TX.1 | length 1110.2
  Power Plane w5: J3.2 350,754.21 v2(350,950)
  Signal Layer 2 w5: v2(350,950) 350,685 458.18,576.82 v1(789.65,576.82)
  GND Plane w5: v1@790.73,575.73 C4_UART2_TX.2 793.81,642.1 R1_UART2_TX.1
pads on no net: DISPLAY_CONN.CARD_CD DISPLAY_CONN.LITE DISPLAY_CONN.MISO DISPLAY_CONN.TFT_CS J2.1 J2.15 RE_PEC12R.MH1 RE_PEC12R.MH2
copper on no net:
  other v4: 157.48,1740.16

## Polygon pours and split planes (outlines as drawn)
JETSON_3V3 on Power Plane "JETSON_3V3_L01_P007" (solid, pour order 7): 0,0 0,1889.76 3110,1889.76 3110,0
POWER_5V on Power Plane "POWER_5V_L01_P006" (solid, pour order 6): 2482.5,1050 2482.5,1047.94 2563.07,967.37 2568.64,972.94 2640,972.94 2640,0 0,0 0,450 180,450 180,190 270,100 2355,100 2405,150 2405,855 2325,935 2255,935 2235,955 2235,1030 2255,1050
JETSON_5V on Power Plane "JETSON_5V_L01_P004" (solid, pour order 4): 2066.97,120.55 2070,123.58 2070,350 2095,375 2115,375 2130,390 2129.67,390.33 2129.67,516.02 2130.53,516.02 2147.54,533.03 2384.61,533.03 2384.61,164.61 2340,120 2339.45,120.55
JETSON_GND on Signal Layer 2 "JETSON_GND_L03_P010" (solid, pour order 10): 5,1885 5,5 3105,5 3105,1885
JETSON_3V3 on Signal Layer 2 "JETSON_3V3_L03_P009" (solid, pour order 9): 1945,510 1970,530 2055,530 2385,530 2385,275 2335,225 2170,225 2170,310 2145,335 1975,335 1945,365
JETSON_GND on GND Plane "JETSON_GND_L04_P001" (solid, pour order 1): 0,0 0,1889.76 3110.24,1889.76 3110.24,0

## Silkscreen, mask and mechanical layers (free items; w line width, h text height)
Top Overlay:
  lines w10: 309.29,1249.96 1050,1249.96 1050,1845 309.29,1845 309.29,1249.96
  text "UI-V1.0.1 / UBC Thunderbots /  / Designer: / Liam Bontkes / Kenny Wakaba /  / December 27, 2021" at 325,1265 h40
  text "GND" at 200,990 h40 r90
  text "RX" at 258.49,990 h40 r90
  text "HB" at 316.97,990 h40 r90
  text "TX" at 375.46,990 h40 r90
  text "3V3" at 433.95,990 h40 r90
  text "CS0" at 2447.67,910 h40
  text "CS1" at 2461,850 h40
  text "CS2" at 2447.67,790 h40
  text "CS3" at 2447.67,730 h40
  text "CS4" at 2447.67,670 h40
  text "CS5" at 2447.67,615 h40
  text "SCK" at 2447.67,560 h40
  text "MISO" at 2414.35,505 h40
  text "MOSI" at 2421.01,440 h40
  text "EN" at 2487.66,380 h40
  text "GND" at 350,326.77 h40 r90
  text "CS5" at 547.24,326.77 h40 r90
  text "CS4" at 645.67,326.77 h40 r90
  text "CS3" at 748.03,326.77 h40 r90
  text "CS2" at 854.33,326.77 h40 r90
  text "GND" at 1051.18,326.77 h40 r90
  text "SCK" at 1151.18,326.77 h40 r90
  text "MISO" at 1251.18,326.77 h40 r90
  text "MOSI" at 1351.18,326.77 h40 r90
  text "3V3" at 1451.18,326.77 h40 r90
  text "EN" at 1551.18,326.77 h40 r90
  text "GND" at 1850.39,326.77 h40 r90
  text "HB" at 1944.88,326.77 h40 r90
  text "5" at 2043.31,326.77 h40 r90
  text "RST" at 2447.67,320 h40
  text "GND" at 2625,270 h40
  text "3V3" at 2270,245 h40
  text "3V3" at 2625,210 h40
  text "5V" at 2270,140 h40
  text "RX" at 1850.39,44.98 h40 r90
  text "TX" at 1948.82,44.98 h40 r90
  text "5V" at 2157.48,44.98 h40 r90
  text "CS1" at 1051.18,26.66 h40 r90
  text "SDO" at 350,13.33 h40 r90
  text "GND" at 649.6,13.33 h40 r90
  text "RST" at 751.97,13.33 h40 r90
  text "GND" at 850.39,13.33 h40 r90
  text "CS0" at 1149.6,13.33 h40 r90
  text "GND" at 1350.39,13.33 h40 r90
  text "GND" at 1649.6,13.33 h40 r90
  text "GND" at 2051.18,13.33 h40 r90
Bottom Overlay:
  text "---->" at 2355,935 h30
Mechanical 1:
  lines w10: 0,0 0,1889.76 3940,1889.76 3940,0 0,0